# EAGLE board SparkFun_miniUSB_Breakout_Panel_v13b (EAGLE 7.5.0)
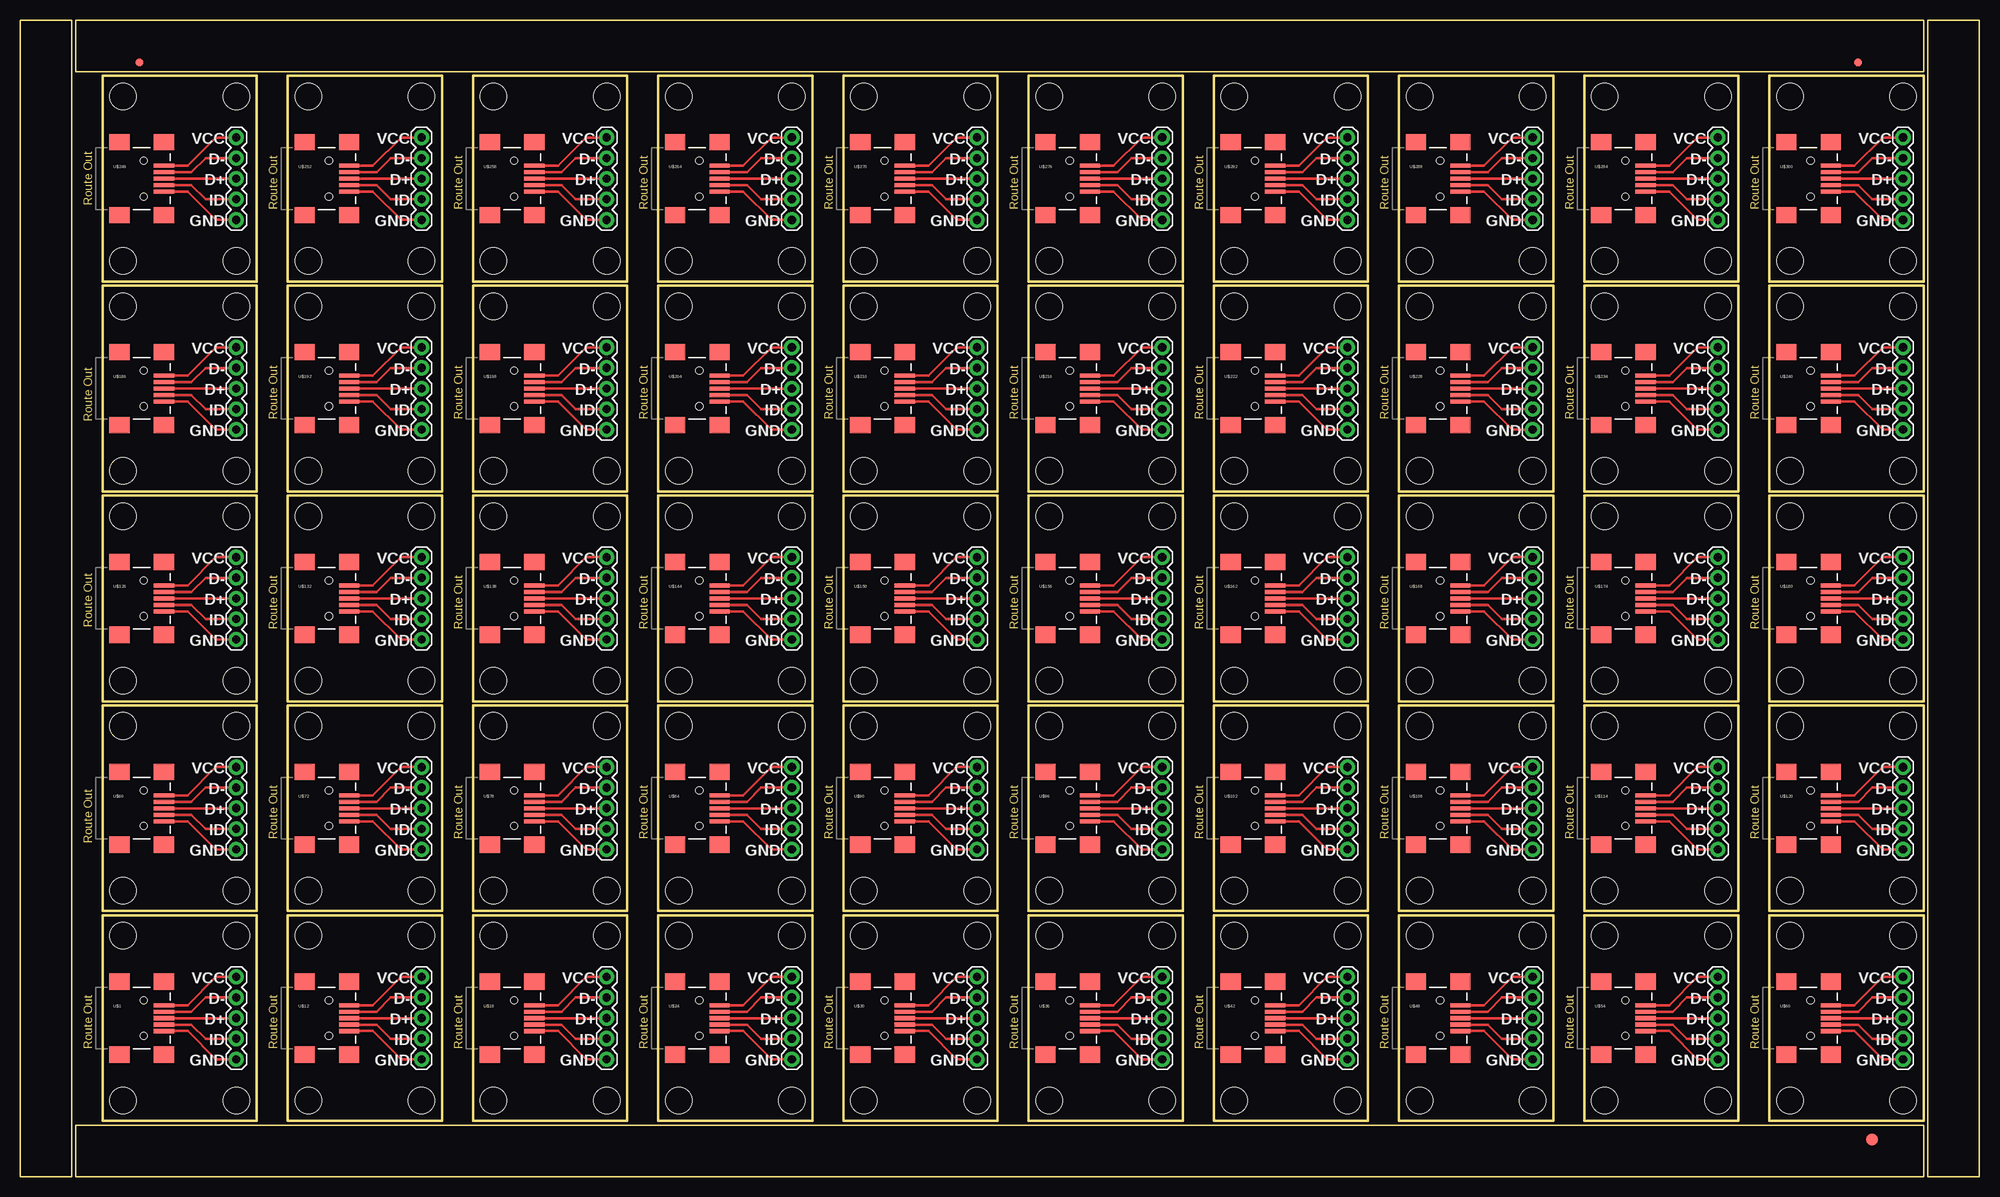
[diagram p0: board, top side]
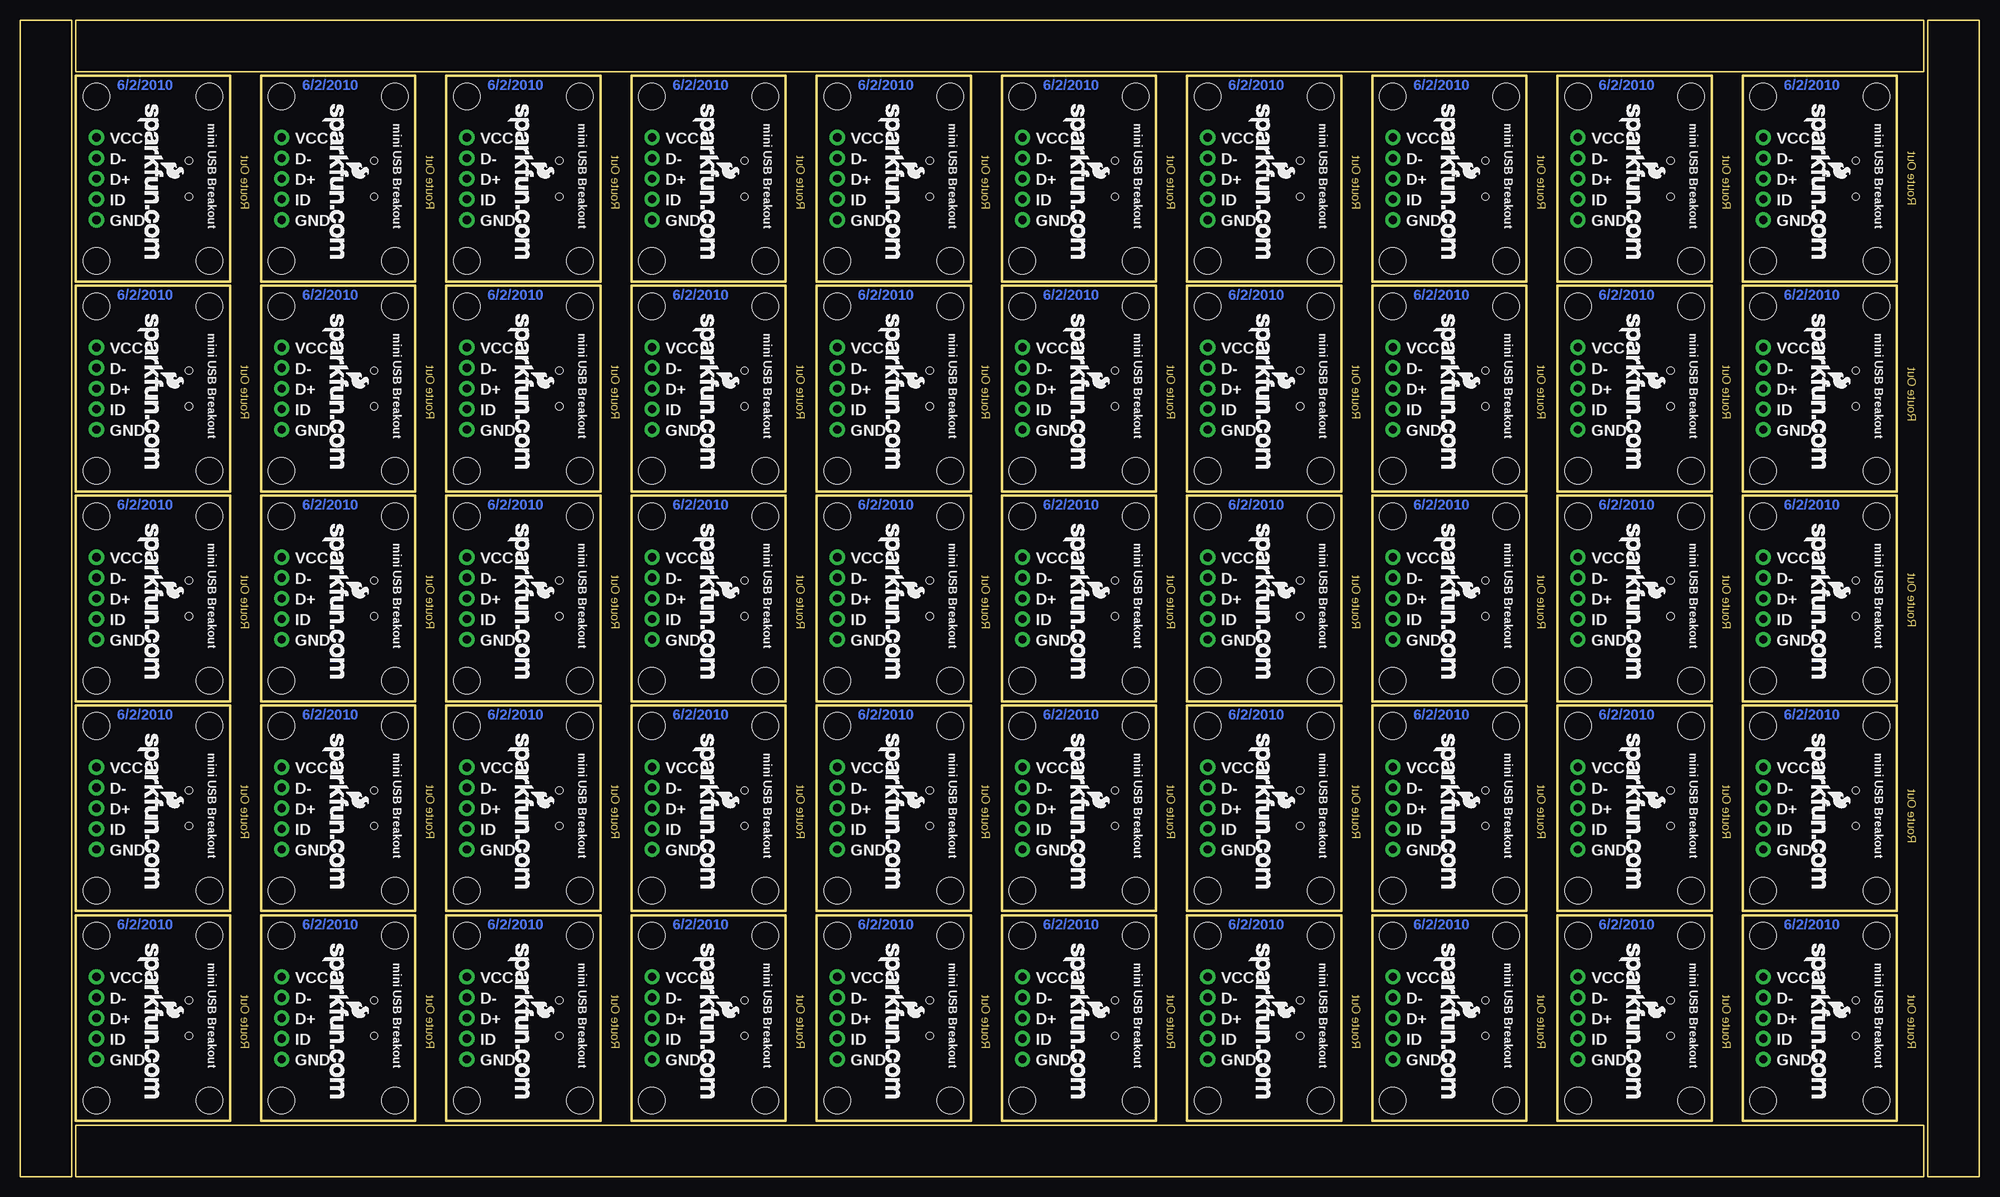
[diagram p1: board, bottom side, seen from below]

Size 241.81 x 142.75 mm. Coordinates in mm from the lower left corner, seen from the top.
Outline: 224 segments
Copper layers (1*16): Top 0.035mm / dielectric 1.5mm / Bottom 0.035mm
Design rules "SparkFun": minimum track width 8mil, minimum drill 20mil, track to track 8mil, track to pad 8mil, pad to pad 8mil, via to via 8mil, smd to smd 8mil, copper to edge 10mil, drill to drill 8mil, minimum pad ring 12mil, minimum via ring 10mil, stop-mask expansion 4mil, vias tented up to drill 20mil, thermal gap 10mil
Net classes: 0 default: width 0.203 mm; 1 power: width 0.305 mm

## Footprints (pad centres in the part's own frame; a part is rotated, then mirrored left to right if it is on the bottom)
FIDUCIAL-1.5X3 = smd 1.5 x 1.5: 1 0,0
FIDUCIAL-1X2 = smd 1 x 1: 1 0,0
1X05 = drill 1.016 pad 1.88: 1 0,0; 2 2.54,0; 3 5.08,0; 4 7.62,0; 5 10.16,0
USB-MINIB = smd 2.5 x 0.5: D+ 2.5,0; D- 2.5,0.8; GND 2.5,-1.6; ID 2.5,-0.8; VBUS 2.5,1.6 | smd 2.5 x 2: MTN1 -3,4.5; MTN2 2.5,4.5; MTN3 -3,-4.5; MTN4 2.5,-4.5 | hole 0.9: 0,2.2; 0,-2.2
STAND-OFF = hole 3.302: 0,0

## Placement (x,y rotation side)
E$1  [FIDUCIAL-1.5X3]  228.6,4.57 0 top
E$7  [FIDUCIAL-1X2]  226.82,137.54 90 top
E$8  [FIDUCIAL-1X2]  14.73,137.54 270 top
JP1  [1X05]  26.67,24.64 270 top
JP2  [1X05]  49.53,24.64 270 top
JP3  [1X05]  72.39,24.64 270 top
JP4  [1X05]  95.25,24.64 270 top
JP5  [1X05]  118.11,24.64 270 top
JP6  [1X05]  140.97,24.64 270 top
JP7  [1X05]  163.83,24.64 270 top
JP8  [1X05]  186.69,24.64 270 top
JP9  [1X05]  209.55,24.64 270 top
JP10  [1X05]  232.41,24.64 270 top
JP11  [1X05]  26.67,50.55 270 top
JP12  [1X05]  49.53,50.55 270 top
JP13  [1X05]  72.39,50.55 270 top
JP14  [1X05]  95.25,50.55 270 top
JP15  [1X05]  118.11,50.55 270 top
JP16  [1X05]  140.97,50.55 270 top
JP17  [1X05]  163.83,50.55 270 top
JP18  [1X05]  186.69,50.55 270 top
JP19  [1X05]  209.55,50.55 270 top
JP20  [1X05]  232.41,50.55 270 top
JP21  [1X05]  26.67,76.45 270 top
JP22  [1X05]  49.53,76.45 270 top
JP23  [1X05]  72.39,76.45 270 top
JP24  [1X05]  95.25,76.45 270 top
JP25  [1X05]  118.11,76.45 270 top
JP26  [1X05]  140.97,76.45 270 top
JP27  [1X05]  163.83,76.45 270 top
JP28  [1X05]  186.69,76.45 270 top
JP29  [1X05]  209.55,76.45 270 top
JP30  [1X05]  232.41,76.45 270 top
JP31  [1X05]  26.67,102.36 270 top
JP32  [1X05]  49.53,102.36 270 top
JP33  [1X05]  72.39,102.36 270 top
JP34  [1X05]  95.25,102.36 270 top
JP35  [1X05]  118.11,102.36 270 top
JP36  [1X05]  140.97,102.36 270 top
JP37  [1X05]  163.83,102.36 270 top
JP38  [1X05]  186.69,102.36 270 top
JP39  [1X05]  209.55,102.36 270 top
JP40  [1X05]  232.41,102.36 270 top
JP41  [1X05]  26.67,128.27 270 top
JP42  [1X05]  49.53,128.27 270 top
JP43  [1X05]  72.39,128.27 270 top
JP44  [1X05]  95.25,128.27 270 top
JP45  [1X05]  118.11,128.27 270 top
JP46  [1X05]  140.97,128.27 270 top
JP47  [1X05]  163.83,128.27 270 top
JP48  [1X05]  186.69,128.27 270 top
JP49  [1X05]  209.55,128.27 270 top
JP50  [1X05]  232.41,128.27 270 top
U$1  USB-MINIB-5PIN  [USB-MINIB]  15.24,19.56 0 top
U$2  STAND-OFF  [STAND-OFF]  26.67,9.4 0 top
U$3  STAND-OFF  [STAND-OFF]  12.7,9.4 0 top
U$4  STAND-OFF  [STAND-OFF]  12.7,29.72 0 top
U$5  STAND-OFF  [STAND-OFF]  26.67,29.72 0 top
U$6  LOGO-SFENEW  [SFE-NEW-WEBLOGO]  21.59,28.7 270 bottom
U$7  STAND-OFF  [STAND-OFF]  49.53,9.4 0 top
U$8  STAND-OFF  [STAND-OFF]  35.56,9.4 0 top
U$9  STAND-OFF  [STAND-OFF]  35.56,29.72 0 top
U$10  STAND-OFF  [STAND-OFF]  49.53,29.72 0 top
U$11  LOGO-SFENEW  [SFE-NEW-WEBLOGO]  44.45,28.7 270 bottom
U$12  USB-MINIB-5PIN  [USB-MINIB]  38.1,19.56 0 top
U$13  STAND-OFF  [STAND-OFF]  72.39,9.4 0 top
U$14  STAND-OFF  [STAND-OFF]  58.42,9.4 0 top
U$15  STAND-OFF  [STAND-OFF]  58.42,29.72 0 top
U$16  STAND-OFF  [STAND-OFF]  72.39,29.72 0 top
U$17  LOGO-SFENEW  [SFE-NEW-WEBLOGO]  67.31,28.7 270 bottom
U$18  USB-MINIB-5PIN  [USB-MINIB]  60.96,19.56 0 top
U$19  STAND-OFF  [STAND-OFF]  95.25,9.4 0 top
U$20  STAND-OFF  [STAND-OFF]  81.28,9.4 0 top
U$21  STAND-OFF  [STAND-OFF]  81.28,29.72 0 top
U$22  STAND-OFF  [STAND-OFF]  95.25,29.72 0 top
U$23  LOGO-SFENEW  [SFE-NEW-WEBLOGO]  90.17,28.7 270 bottom
U$24  USB-MINIB-5PIN  [USB-MINIB]  83.82,19.56 0 top
U$25  STAND-OFF  [STAND-OFF]  118.11,9.4 0 top
U$26  STAND-OFF  [STAND-OFF]  104.14,9.4 0 top
U$27  STAND-OFF  [STAND-OFF]  104.14,29.72 0 top
U$28  STAND-OFF  [STAND-OFF]  118.11,29.72 0 top
U$29  LOGO-SFENEW  [SFE-NEW-WEBLOGO]  113.03,28.7 270 bottom
U$30  USB-MINIB-5PIN  [USB-MINIB]  106.68,19.56 0 top
U$31  STAND-OFF  [STAND-OFF]  140.97,9.4 0 top
U$32  STAND-OFF  [STAND-OFF]  127,9.4 0 top
U$33  STAND-OFF  [STAND-OFF]  127,29.72 0 top
U$34  STAND-OFF  [STAND-OFF]  140.97,29.72 0 top
U$35  LOGO-SFENEW  [SFE-NEW-WEBLOGO]  135.89,28.7 270 bottom
U$36  USB-MINIB-5PIN  [USB-MINIB]  129.54,19.56 0 top
U$37  STAND-OFF  [STAND-OFF]  163.83,9.4 0 top
U$38  STAND-OFF  [STAND-OFF]  149.86,9.4 0 top
U$39  STAND-OFF  [STAND-OFF]  149.86,29.72 0 top
U$40  STAND-OFF  [STAND-OFF]  163.83,29.72 0 top
U$41  LOGO-SFENEW  [SFE-NEW-WEBLOGO]  158.75,28.7 270 bottom
U$42  USB-MINIB-5PIN  [USB-MINIB]  152.4,19.56 0 top
U$43  STAND-OFF  [STAND-OFF]  186.69,9.4 0 top
U$44  STAND-OFF  [STAND-OFF]  172.72,9.4 0 top
U$45  STAND-OFF  [STAND-OFF]  172.72,29.72 0 top
U$46  STAND-OFF  [STAND-OFF]  186.69,29.72 0 top
U$47  LOGO-SFENEW  [SFE-NEW-WEBLOGO]  181.61,28.7 270 bottom
U$48  USB-MINIB-5PIN  [USB-MINIB]  175.26,19.56 0 top
U$49  STAND-OFF  [STAND-OFF]  209.55,9.4 0 top
U$50  STAND-OFF  [STAND-OFF]  195.58,9.4 0 top
U$51  STAND-OFF  [STAND-OFF]  195.58,29.72 0 top
U$52  STAND-OFF  [STAND-OFF]  209.55,29.72 0 top
U$53  LOGO-SFENEW  [SFE-NEW-WEBLOGO]  204.47,28.7 270 bottom
U$54  USB-MINIB-5PIN  [USB-MINIB]  198.12,19.56 0 top
U$55  STAND-OFF  [STAND-OFF]  232.41,9.4 0 top
U$56  STAND-OFF  [STAND-OFF]  218.44,9.4 0 top
U$57  STAND-OFF  [STAND-OFF]  218.44,29.72 0 top
U$58  STAND-OFF  [STAND-OFF]  232.41,29.72 0 top
U$59  LOGO-SFENEW  [SFE-NEW-WEBLOGO]  227.33,28.7 270 bottom
U$60  USB-MINIB-5PIN  [USB-MINIB]  220.98,19.56 0 top
U$61  STAND-OFF  [STAND-OFF]  26.67,35.31 0 top
U$62  STAND-OFF  [STAND-OFF]  12.7,35.31 0 top
U$63  STAND-OFF  [STAND-OFF]  12.7,55.63 0 top
U$64  STAND-OFF  [STAND-OFF]  26.67,55.63 0 top
U$65  LOGO-SFENEW  [SFE-NEW-WEBLOGO]  21.59,54.61 270 bottom
U$66  USB-MINIB-5PIN  [USB-MINIB]  15.24,45.47 0 top
U$67  STAND-OFF  [STAND-OFF]  49.53,35.31 0 top
U$68  STAND-OFF  [STAND-OFF]  35.56,35.31 0 top
U$69  STAND-OFF  [STAND-OFF]  35.56,55.63 0 top
U$70  STAND-OFF  [STAND-OFF]  49.53,55.63 0 top
U$71  LOGO-SFENEW  [SFE-NEW-WEBLOGO]  44.45,54.61 270 bottom
U$72  USB-MINIB-5PIN  [USB-MINIB]  38.1,45.47 0 top
U$73  STAND-OFF  [STAND-OFF]  72.39,35.31 0 top
U$74  STAND-OFF  [STAND-OFF]  58.42,35.31 0 top
U$75  STAND-OFF  [STAND-OFF]  58.42,55.63 0 top
U$76  STAND-OFF  [STAND-OFF]  72.39,55.63 0 top
U$77  LOGO-SFENEW  [SFE-NEW-WEBLOGO]  67.31,54.61 270 bottom
U$78  USB-MINIB-5PIN  [USB-MINIB]  60.96,45.47 0 top
U$79  STAND-OFF  [STAND-OFF]  95.25,35.31 0 top
U$80  STAND-OFF  [STAND-OFF]  81.28,35.31 0 top
U$81  STAND-OFF  [STAND-OFF]  81.28,55.63 0 top
U$82  STAND-OFF  [STAND-OFF]  95.25,55.63 0 top
U$83  LOGO-SFENEW  [SFE-NEW-WEBLOGO]  90.17,54.61 270 bottom
U$84  USB-MINIB-5PIN  [USB-MINIB]  83.82,45.47 0 top
U$85  STAND-OFF  [STAND-OFF]  118.11,35.31 0 top
U$86  STAND-OFF  [STAND-OFF]  104.14,35.31 0 top
U$87  STAND-OFF  [STAND-OFF]  104.14,55.63 0 top
U$88  STAND-OFF  [STAND-OFF]  118.11,55.63 0 top
U$89  LOGO-SFENEW  [SFE-NEW-WEBLOGO]  113.03,54.61 270 bottom
U$90  USB-MINIB-5PIN  [USB-MINIB]  106.68,45.47 0 top
U$91  STAND-OFF  [STAND-OFF]  140.97,35.31 0 top
U$92  STAND-OFF  [STAND-OFF]  127,35.31 0 top
U$93  STAND-OFF  [STAND-OFF]  127,55.63 0 top
U$94  STAND-OFF  [STAND-OFF]  140.97,55.63 0 top
U$95  LOGO-SFENEW  [SFE-NEW-WEBLOGO]  135.89,54.61 270 bottom
U$96  USB-MINIB-5PIN  [USB-MINIB]  129.54,45.47 0 top
U$97  STAND-OFF  [STAND-OFF]  163.83,35.31 0 top
U$98  STAND-OFF  [STAND-OFF]  149.86,35.31 0 top
U$99  STAND-OFF  [STAND-OFF]  149.86,55.63 0 top
U$100  STAND-OFF  [STAND-OFF]  163.83,55.63 0 top
U$101  LOGO-SFENEW  [SFE-NEW-WEBLOGO]  158.75,54.61 270 bottom
U$102  USB-MINIB-5PIN  [USB-MINIB]  152.4,45.47 0 top
U$103  STAND-OFF  [STAND-OFF]  186.69,35.31 0 top
U$104  STAND-OFF  [STAND-OFF]  172.72,35.31 0 top
U$105  STAND-OFF  [STAND-OFF]  172.72,55.63 0 top
U$106  STAND-OFF  [STAND-OFF]  186.69,55.63 0 top
U$107  LOGO-SFENEW  [SFE-NEW-WEBLOGO]  181.61,54.61 270 bottom
U$108  USB-MINIB-5PIN  [USB-MINIB]  175.26,45.47 0 top
U$109  STAND-OFF  [STAND-OFF]  209.55,35.31 0 top
U$110  STAND-OFF  [STAND-OFF]  195.58,35.31 0 top
U$111  STAND-OFF  [STAND-OFF]  195.58,55.63 0 top
U$112  STAND-OFF  [STAND-OFF]  209.55,55.63 0 top
U$113  LOGO-SFENEW  [SFE-NEW-WEBLOGO]  204.47,54.61 270 bottom
U$114  USB-MINIB-5PIN  [USB-MINIB]  198.12,45.47 0 top
U$115  STAND-OFF  [STAND-OFF]  232.41,35.31 0 top
U$116  STAND-OFF  [STAND-OFF]  218.44,35.31 0 top
U$117  STAND-OFF  [STAND-OFF]  218.44,55.63 0 top
U$118  STAND-OFF  [STAND-OFF]  232.41,55.63 0 top
U$119  LOGO-SFENEW  [SFE-NEW-WEBLOGO]  227.33,54.61 270 bottom
U$120  USB-MINIB-5PIN  [USB-MINIB]  220.98,45.47 0 top
U$121  STAND-OFF  [STAND-OFF]  26.67,61.21 0 top
U$122  STAND-OFF  [STAND-OFF]  12.7,61.21 0 top
U$123  STAND-OFF  [STAND-OFF]  12.7,81.53 0 top
U$124  STAND-OFF  [STAND-OFF]  26.67,81.53 0 top
U$125  LOGO-SFENEW  [SFE-NEW-WEBLOGO]  21.59,80.52 270 bottom
U$126  USB-MINIB-5PIN  [USB-MINIB]  15.24,71.37 0 top
U$127  STAND-OFF  [STAND-OFF]  49.53,61.21 0 top
U$128  STAND-OFF  [STAND-OFF]  35.56,61.21 0 top
U$129  STAND-OFF  [STAND-OFF]  35.56,81.53 0 top
U$130  STAND-OFF  [STAND-OFF]  49.53,81.53 0 top
U$131  LOGO-SFENEW  [SFE-NEW-WEBLOGO]  44.45,80.52 270 bottom
U$132  USB-MINIB-5PIN  [USB-MINIB]  38.1,71.37 0 top
U$133  STAND-OFF  [STAND-OFF]  72.39,61.21 0 top
U$134  STAND-OFF  [STAND-OFF]  58.42,61.21 0 top
U$135  STAND-OFF  [STAND-OFF]  58.42,81.53 0 top
U$136  STAND-OFF  [STAND-OFF]  72.39,81.53 0 top
U$137  LOGO-SFENEW  [SFE-NEW-WEBLOGO]  67.31,80.52 270 bottom
U$138  USB-MINIB-5PIN  [USB-MINIB]  60.96,71.37 0 top
U$139  STAND-OFF  [STAND-OFF]  95.25,61.21 0 top
U$140  STAND-OFF  [STAND-OFF]  81.28,61.21 0 top
U$141  STAND-OFF  [STAND-OFF]  81.28,81.53 0 top
U$142  STAND-OFF  [STAND-OFF]  95.25,81.53 0 top
U$143  LOGO-SFENEW  [SFE-NEW-WEBLOGO]  90.17,80.52 270 bottom
U$144  USB-MINIB-5PIN  [USB-MINIB]  83.82,71.37 0 top
U$145  STAND-OFF  [STAND-OFF]  118.11,61.21 0 top
U$146  STAND-OFF  [STAND-OFF]  104.14,61.21 0 top
U$147  STAND-OFF  [STAND-OFF]  104.14,81.53 0 top
U$148  STAND-OFF  [STAND-OFF]  118.11,81.53 0 top
U$149  LOGO-SFENEW  [SFE-NEW-WEBLOGO]  113.03,80.52 270 bottom
U$150  USB-MINIB-5PIN  [USB-MINIB]  106.68,71.37 0 top
U$151  STAND-OFF  [STAND-OFF]  140.97,61.21 0 top
U$152  STAND-OFF  [STAND-OFF]  127,61.21 0 top
U$153  STAND-OFF  [STAND-OFF]  127,81.53 0 top
U$154  STAND-OFF  [STAND-OFF]  140.97,81.53 0 top
U$155  LOGO-SFENEW  [SFE-NEW-WEBLOGO]  135.89,80.52 270 bottom
U$156  USB-MINIB-5PIN  [USB-MINIB]  129.54,71.37 0 top
U$157  STAND-OFF  [STAND-OFF]  163.83,61.21 0 top
U$158  STAND-OFF  [STAND-OFF]  149.86,61.21 0 top
U$159  STAND-OFF  [STAND-OFF]  149.86,81.53 0 top
U$160  STAND-OFF  [STAND-OFF]  163.83,81.53 0 top
U$161  LOGO-SFENEW  [SFE-NEW-WEBLOGO]  158.75,80.52 270 bottom
U$162  USB-MINIB-5PIN  [USB-MINIB]  152.4,71.37 0 top
U$163  STAND-OFF  [STAND-OFF]  186.69,61.21 0 top
U$164  STAND-OFF  [STAND-OFF]  172.72,61.21 0 top
U$165  STAND-OFF  [STAND-OFF]  172.72,81.53 0 top
U$166  STAND-OFF  [STAND-OFF]  186.69,81.53 0 top
U$167  LOGO-SFENEW  [SFE-NEW-WEBLOGO]  181.61,80.52 270 bottom
U$168  USB-MINIB-5PIN  [USB-MINIB]  175.26,71.37 0 top
U$169  STAND-OFF  [STAND-OFF]  209.55,61.21 0 top
U$170  STAND-OFF  [STAND-OFF]  195.58,61.21 0 top
U$171  STAND-OFF  [STAND-OFF]  195.58,81.53 0 top
U$172  STAND-OFF  [STAND-OFF]  209.55,81.53 0 top
U$173  LOGO-SFENEW  [SFE-NEW-WEBLOGO]  204.47,80.52 270 bottom
U$174  USB-MINIB-5PIN  [USB-MINIB]  198.12,71.37 0 top
U$175  STAND-OFF  [STAND-OFF]  232.41,61.21 0 top
U$176  STAND-OFF  [STAND-OFF]  218.44,61.21 0 top
U$177  STAND-OFF  [STAND-OFF]  218.44,81.53 0 top
U$178  STAND-OFF  [STAND-OFF]  232.41,81.53 0 top
U$179  LOGO-SFENEW  [SFE-NEW-WEBLOGO]  227.33,80.52 270 bottom
U$180  USB-MINIB-5PIN  [USB-MINIB]  220.98,71.37 0 top
U$181  STAND-OFF  [STAND-OFF]  26.67,87.12 0 top
U$182  STAND-OFF  [STAND-OFF]  12.7,87.12 0 top
U$183  STAND-OFF  [STAND-OFF]  12.7,107.44 0 top
U$184  STAND-OFF  [STAND-OFF]  26.67,107.44 0 top
U$185  LOGO-SFENEW  [SFE-NEW-WEBLOGO]  21.59,106.43 270 bottom
U$186  USB-MINIB-5PIN  [USB-MINIB]  15.24,97.28 0 top
U$187  STAND-OFF  [STAND-OFF]  49.53,87.12 0 top
U$188  STAND-OFF  [STAND-OFF]  35.56,87.12 0 top
U$189  STAND-OFF  [STAND-OFF]  35.56,107.44 0 top
U$190  STAND-OFF  [STAND-OFF]  49.53,107.44 0 top
U$191  LOGO-SFENEW  [SFE-NEW-WEBLOGO]  44.45,106.43 270 bottom
U$192  USB-MINIB-5PIN  [USB-MINIB]  38.1,97.28 0 top
U$193  STAND-OFF  [STAND-OFF]  72.39,87.12 0 top
U$194  STAND-OFF  [STAND-OFF]  58.42,87.12 0 top
U$195  STAND-OFF  [STAND-OFF]  58.42,107.44 0 top
U$196  STAND-OFF  [STAND-OFF]  72.39,107.44 0 top
U$197  LOGO-SFENEW  [SFE-NEW-WEBLOGO]  67.31,106.43 270 bottom
U$198  USB-MINIB-5PIN  [USB-MINIB]  60.96,97.28 0 top
U$199  STAND-OFF  [STAND-OFF]  95.25,87.12 0 top
U$200  STAND-OFF  [STAND-OFF]  81.28,87.12 0 top
U$201  STAND-OFF  [STAND-OFF]  81.28,107.44 0 top
U$202  STAND-OFF  [STAND-OFF]  95.25,107.44 0 top
U$203  LOGO-SFENEW  [SFE-NEW-WEBLOGO]  90.17,106.43 270 bottom
U$204  USB-MINIB-5PIN  [USB-MINIB]  83.82,97.28 0 top
U$205  STAND-OFF  [STAND-OFF]  118.11,87.12 0 top
U$206  STAND-OFF  [STAND-OFF]  104.14,87.12 0 top
U$207  STAND-OFF  [STAND-OFF]  104.14,107.44 0 top
U$208  STAND-OFF  [STAND-OFF]  118.11,107.44 0 top
U$209  LOGO-SFENEW  [SFE-NEW-WEBLOGO]  113.03,106.43 270 bottom
U$210  USB-MINIB-5PIN  [USB-MINIB]  106.68,97.28 0 top
U$211  STAND-OFF  [STAND-OFF]  140.97,87.12 0 top
U$212  STAND-OFF  [STAND-OFF]  127,87.12 0 top
U$213  STAND-OFF  [STAND-OFF]  127,107.44 0 top
U$214  STAND-OFF  [STAND-OFF]  140.97,107.44 0 top
U$215  LOGO-SFENEW  [SFE-NEW-WEBLOGO]  135.89,106.43 270 bottom
U$216  USB-MINIB-5PIN  [USB-MINIB]  129.54,97.28 0 top
U$217  STAND-OFF  [STAND-OFF]  163.83,87.12 0 top
U$218  STAND-OFF  [STAND-OFF]  149.86,87.12 0 top
U$219  STAND-OFF  [STAND-OFF]  149.86,107.44 0 top
U$220  STAND-OFF  [STAND-OFF]  163.83,107.44 0 top
U$221  LOGO-SFENEW  [SFE-NEW-WEBLOGO]  158.75,106.43 270 bottom
U$222  USB-MINIB-5PIN  [USB-MINIB]  152.4,97.28 0 top
U$223  STAND-OFF  [STAND-OFF]  186.69,87.12 0 top
U$224  STAND-OFF  [STAND-OFF]  172.72,87.12 0 top
U$225  STAND-OFF  [STAND-OFF]  172.72,107.44 0 top
U$226  STAND-OFF  [STAND-OFF]  186.69,107.44 0 top
U$227  LOGO-SFENEW  [SFE-NEW-WEBLOGO]  181.61,106.43 270 bottom
U$228  USB-MINIB-5PIN  [USB-MINIB]  175.26,97.28 0 top
U$229  STAND-OFF  [STAND-OFF]  209.55,87.12 0 top
U$230  STAND-OFF  [STAND-OFF]  195.58,87.12 0 top
U$231  STAND-OFF  [STAND-OFF]  195.58,107.44 0 top
U$232  STAND-OFF  [STAND-OFF]  209.55,107.44 0 top
U$233  LOGO-SFENEW  [SFE-NEW-WEBLOGO]  204.47,106.43 270 bottom
U$234  USB-MINIB-5PIN  [USB-MINIB]  198.12,97.28 0 top
U$235  STAND-OFF  [STAND-OFF]  232.41,87.12 0 top
U$236  STAND-OFF  [STAND-OFF]  218.44,87.12 0 top
U$237  STAND-OFF  [STAND-OFF]  218.44,107.44 0 top
U$238  STAND-OFF  [STAND-OFF]  232.41,107.44 0 top
U$239  LOGO-SFENEW  [SFE-NEW-WEBLOGO]  227.33,106.43 270 bottom
U$240  USB-MINIB-5PIN  [USB-MINIB]  220.98,97.28 0 top
U$241  STAND-OFF  [STAND-OFF]  26.67,113.03 0 top
U$242  STAND-OFF  [STAND-OFF]  12.7,113.03 0 top
U$243  STAND-OFF  [STAND-OFF]  12.7,133.35 0 top
U$244  STAND-OFF  [STAND-OFF]  26.67,133.35 0 top
U$245  LOGO-SFENEW  [SFE-NEW-WEBLOGO]  21.59,132.33 270 bottom
U$246  USB-MINIB-5PIN  [USB-MINIB]  15.24,123.19 0 top
U$247  STAND-OFF  [STAND-OFF]  49.53,113.03 0 top
U$248  STAND-OFF  [STAND-OFF]  35.56,113.03 0 top
U$249  STAND-OFF  [STAND-OFF]  35.56,133.35 0 top
U$250  STAND-OFF  [STAND-OFF]  49.53,133.35 0 top
U$251  LOGO-SFENEW  [SFE-NEW-WEBLOGO]  44.45,132.33 270 bottom
U$252  USB-MINIB-5PIN  [USB-MINIB]  38.1,123.19 0 top
U$253  STAND-OFF  [STAND-OFF]  72.39,113.03 0 top
U$254  STAND-OFF  [STAND-OFF]  58.42,113.03 0 top
U$255  STAND-OFF  [STAND-OFF]  58.42,133.35 0 top
U$256  STAND-OFF  [STAND-OFF]  72.39,133.35 0 top
U$257  LOGO-SFENEW  [SFE-NEW-WEBLOGO]  67.31,132.33 270 bottom
U$258  USB-MINIB-5PIN  [USB-MINIB]  60.96,123.19 0 top
U$259  STAND-OFF  [STAND-OFF]  95.25,113.03 0 top
U$260  STAND-OFF  [STAND-OFF]  81.28,113.03 0 top
U$261  STAND-OFF  [STAND-OFF]  81.28,133.35 0 top
U$262  STAND-OFF  [STAND-OFF]  95.25,133.35 0 top
U$263  LOGO-SFENEW  [SFE-NEW-WEBLOGO]  90.17,132.33 270 bottom
U$264  USB-MINIB-5PIN  [USB-MINIB]  83.82,123.19 0 top
U$265  STAND-OFF  [STAND-OFF]  118.11,113.03 0 top
U$266  STAND-OFF  [STAND-OFF]  104.14,113.03 0 top
U$267  STAND-OFF  [STAND-OFF]  104.14,133.35 0 top
U$268  STAND-OFF  [STAND-OFF]  118.11,133.35 0 top
U$269  LOGO-SFENEW  [SFE-NEW-WEBLOGO]  113.03,132.33 270 bottom
U$270  USB-MINIB-5PIN  [USB-MINIB]  106.68,123.19 0 top
U$271  STAND-OFF  [STAND-OFF]  140.97,113.03 0 top
U$272  STAND-OFF  [STAND-OFF]  127,113.03 0 top
U$273  STAND-OFF  [STAND-OFF]  127,133.35 0 top
U$274  STAND-OFF  [STAND-OFF]  140.97,133.35 0 top
U$275  LOGO-SFENEW  [SFE-NEW-WEBLOGO]  135.89,132.33 270 bottom
U$276  USB-MINIB-5PIN  [USB-MINIB]  129.54,123.19 0 top
U$277  STAND-OFF  [STAND-OFF]  163.83,113.03 0 top
U$278  STAND-OFF  [STAND-OFF]  149.86,113.03 0 top
U$279  STAND-OFF  [STAND-OFF]  149.86,133.35 0 top
U$280  STAND-OFF  [STAND-OFF]  163.83,133.35 0 top
U$281  LOGO-SFENEW  [SFE-NEW-WEBLOGO]  158.75,132.33 270 bottom
U$282  USB-MINIB-5PIN  [USB-MINIB]  152.4,123.19 0 top
U$283  STAND-OFF  [STAND-OFF]  186.69,113.03 0 top
U$284  STAND-OFF  [STAND-OFF]  172.72,113.03 0 top
U$285  STAND-OFF  [STAND-OFF]  172.72,133.35 0 top
U$286  STAND-OFF  [STAND-OFF]  186.69,133.35 0 top
U$287  LOGO-SFENEW  [SFE-NEW-WEBLOGO]  181.61,132.33 270 bottom
U$288  USB-MINIB-5PIN  [USB-MINIB]  175.26,123.19 0 top
U$289  STAND-OFF  [STAND-OFF]  209.55,113.03 0 top
U$290  STAND-OFF  [STAND-OFF]  195.58,113.03 0 top
U$291  STAND-OFF  [STAND-OFF]  195.58,133.35 0 top
U$292  STAND-OFF  [STAND-OFF]  209.55,133.35 0 top
U$293  LOGO-SFENEW  [SFE-NEW-WEBLOGO]  204.47,132.33 270 bottom
U$294  USB-MINIB-5PIN  [USB-MINIB]  198.12,123.19 0 top
U$295  STAND-OFF  [STAND-OFF]  232.41,113.03 0 top
U$296  STAND-OFF  [STAND-OFF]  218.44,113.03 0 top
U$297  STAND-OFF  [STAND-OFF]  218.44,133.35 0 top
U$298  STAND-OFF  [STAND-OFF]  232.41,133.35 0 top
U$299  LOGO-SFENEW  [SFE-NEW-WEBLOGO]  227.33,132.33 270 bottom
U$300  USB-MINIB-5PIN  [USB-MINIB]  220.98,123.19 0 top

## Library data of the parts
E$1 = SparkFun-Retired
E$7 E$8 = SparkFun-Aesthetics
JP1-JP50 U$1-U$300 = SparkFun

## Nets
GND: JP1.5 U$1.GND
GND1: JP2.5 U$12.GND
GND2: JP3.5 U$18.GND
GND3: JP4.5 U$24.GND
GND4: JP5.5 U$30.GND
GND5: JP6.5 U$36.GND
GND6: JP7.5 U$42.GND
GND7: JP8.5 U$48.GND
GND8: JP9.5 U$54.GND
GND9: JP10.5 U$60.GND
GND10: JP11.5 U$66.GND
GND11: JP12.5 U$72.GND
GND12: JP13.5 U$78.GND
GND13: JP14.5 U$84.GND
GND14: JP15.5 U$90.GND
GND15: JP16.5 U$96.GND
GND16: JP17.5 U$102.GND
GND17: JP18.5 U$108.GND
GND18: JP19.5 U$114.GND
GND19: JP20.5 U$120.GND
GND20: JP21.5 U$126.GND
GND21: JP22.5 U$132.GND
GND22: JP23.5 U$138.GND
GND23: JP24.5 U$144.GND
GND24: JP25.5 U$150.GND
GND25: JP26.5 U$156.GND
GND26: JP27.5 U$162.GND
GND27: JP28.5 U$168.GND
GND28: JP29.5 U$174.GND
GND29: JP30.5 U$180.GND
GND30: JP31.5 U$186.GND
GND31: JP32.5 U$192.GND
GND32: JP33.5 U$198.GND
GND33: JP34.5 U$204.GND
GND34: JP35.5 U$210.GND
GND35: JP36.5 U$216.GND
GND36: JP37.5 U$222.GND
GND37: JP38.5 U$228.GND
GND38: JP39.5 U$234.GND
GND39: JP40.5 U$240.GND
GND40: JP41.5 U$246.GND
GND41: JP42.5 U$252.GND
GND42: JP43.5 U$258.GND
GND43: JP44.5 U$264.GND
GND44: JP45.5 U$270.GND
GND45: JP46.5 U$276.GND
GND46: JP47.5 U$282.GND
GND47: JP48.5 U$288.GND
GND48: JP49.5 U$294.GND
GND49: JP50.5 U$300.GND
N$1: JP1.2 U$1.D-
N$2: JP1.1 U$1.VBUS
N$3: JP1.3 U$1.D+
N$4: JP2.2 U$12.D-
N$5: JP1.4 U$1.ID
N$6: JP2.1 U$12.VBUS
N$7: JP2.3 U$12.D+
N$8: JP2.4 U$12.ID
N$9: JP3.2 U$18.D-
N$10: JP3.1 U$18.VBUS
N$11: JP3.3 U$18.D+
N$12: JP3.4 U$18.ID
N$13: JP4.2 U$24.D-
N$14: JP4.1 U$24.VBUS
N$15: JP4.3 U$24.D+
N$16: JP4.4 U$24.ID
N$17: JP5.2 U$30.D-
N$18: JP5.1 U$30.VBUS
N$19: JP5.3 U$30.D+
N$20: JP5.4 U$30.ID
N$21: JP6.2 U$36.D-
N$22: JP6.1 U$36.VBUS
N$23: JP6.3 U$36.D+
N$24: JP6.4 U$36.ID
N$25: JP7.2 U$42.D-
N$26: JP7.1 U$42.VBUS
N$27: JP7.3 U$42.D+
N$28: JP7.4 U$42.ID
N$29: JP8.2 U$48.D-
N$30: JP8.1 U$48.VBUS
N$31: JP8.3 U$48.D+
N$32: JP8.4 U$48.ID
N$33: JP9.2 U$54.D-
N$34: JP9.1 U$54.VBUS
N$35: JP9.3 U$54.D+
N$36: JP9.4 U$54.ID
N$37: JP10.2 U$60.D-
N$38: JP10.1 U$60.VBUS
N$39: JP10.3 U$60.D+
N$40: JP10.4 U$60.ID
N$41: JP11.2 U$66.D-
N$42: JP11.1 U$66.VBUS
N$43: JP11.3 U$66.D+
N$44: JP11.4 U$66.ID
N$45: JP12.2 U$72.D-
N$46: JP12.1 U$72.VBUS
N$47: JP12.3 U$72.D+
N$48: JP12.4 U$72.ID
N$49: JP13.2 U$78.D-
N$50: JP13.1 U$78.VBUS
N$51: JP13.3 U$78.D+
N$52: JP13.4 U$78.ID
N$53: JP14.2 U$84.D-
N$54: JP14.1 U$84.VBUS
N$55: JP14.3 U$84.D+
N$56: JP14.4 U$84.ID
N$57: JP15.2 U$90.D-
N$58: JP15.1 U$90.VBUS
N$59: JP15.3 U$90.D+
N$60: JP15.4 U$90.ID
N$61: JP16.2 U$96.D-
N$62: JP16.1 U$96.VBUS
N$63: JP16.3 U$96.D+
N$64: JP16.4 U$96.ID
N$65: JP17.2 U$102.D-
N$66: JP17.1 U$102.VBUS
N$67: JP17.3 U$102.D+
N$68: JP17.4 U$102.ID
N$69: JP18.2 U$108.D-
N$70: JP18.1 U$108.VBUS
N$71: JP18.3 U$108.D+
N$72: JP18.4 U$108.ID
N$73: JP19.2 U$114.D-
N$74: JP19.1 U$114.VBUS
N$75: JP19.3 U$114.D+
N$76: JP19.4 U$114.ID
N$77: JP20.2 U$120.D-
N$78: JP20.1 U$120.VBUS
N$79: JP20.3 U$120.D+
N$80: JP20.4 U$120.ID
N$81: JP21.2 U$126.D-
N$82: JP21.1 U$126.VBUS
N$83: JP21.3 U$126.D+
N$84: JP21.4 U$126.ID
N$85: JP22.2 U$132.D-
N$86: JP22.1 U$132.VBUS
N$87: JP22.3 U$132.D+
N$88: JP22.4 U$132.ID
N$89: JP23.2 U$138.D-
N$90: JP23.1 U$138.VBUS
N$91: JP23.3 U$138.D+
N$92: JP23.4 U$138.ID
N$93: JP24.2 U$144.D-
N$94: JP24.1 U$144.VBUS
N$95: JP24.3 U$144.D+
N$96: JP24.4 U$144.ID
N$97: JP25.2 U$150.D-
N$98: JP25.1 U$150.VBUS
N$99: JP25.3 U$150.D+
N$100: JP25.4 U$150.ID
N$101: JP26.2 U$156.D-
N$102: JP26.1 U$156.VBUS
N$103: JP26.3 U$156.D+
N$104: JP26.4 U$156.ID
N$105: JP27.2 U$162.D-
N$106: JP27.1 U$162.VBUS
N$107: JP27.3 U$162.D+
N$108: JP27.4 U$162.ID
N$109: JP28.2 U$168.D-
N$110: JP28.1 U$168.VBUS
N$111: JP28.3 U$168.D+
N$112: JP28.4 U$168.ID
N$113: JP29.2 U$174.D-
N$114: JP29.1 U$174.VBUS
N$115: JP29.3 U$174.D+
N$116: JP29.4 U$174.ID
N$117: JP30.2 U$180.D-
N$118: JP30.1 U$180.VBUS
N$119: JP30.3 U$180.D+
N$120: JP30.4 U$180.ID
N$121: JP31.2 U$186.D-
N$122: JP31.1 U$186.VBUS
N$123: JP31.3 U$186.D+
N$124: JP31.4 U$186.ID
N$125: JP32.2 U$192.D-
N$126: JP32.1 U$192.VBUS
N$127: JP32.3 U$192.D+
N$128: JP32.4 U$192.ID
N$129: JP33.2 U$198.D-
N$130: JP33.1 U$198.VBUS
N$131: JP33.3 U$198.D+
N$132: JP33.4 U$198.ID
N$133: JP34.2 U$204.D-
N$134: JP34.1 U$204.VBUS
N$135: JP34.3 U$204.D+
N$136: JP34.4 U$204.ID
N$137: JP35.2 U$210.D-
N$138: JP35.1 U$210.VBUS
N$139: JP35.3 U$210.D+
N$140: JP35.4 U$210.ID
N$141: JP36.2 U$216.D-
N$142: JP36.1 U$216.VBUS
N$143: JP36.3 U$216.D+
N$144: JP36.4 U$216.ID
N$145: JP37.2 U$222.D-
N$146: JP37.1 U$222.VBUS
N$147: JP37.3 U$222.D+
N$148: JP37.4 U$222.ID
N$149: JP38.2 U$228.D-
N$150: JP38.1 U$228.VBUS
N$151: JP38.3 U$228.D+
N$152: JP38.4 U$228.ID
N$153: JP39.2 U$234.D-
N$154: JP39.1 U$234.VBUS
N$155: JP39.3 U$234.D+
N$156: JP39.4 U$234.ID
N$157: JP40.2 U$240.D-
N$158: JP40.1 U$240.VBUS
N$159: JP40.3 U$240.D+
N$160: JP40.4 U$240.ID
N$161: JP41.2 U$246.D-
N$162: JP41.1 U$246.VBUS
N$163: JP41.3 U$246.D+
N$164: JP41.4 U$246.ID
N$165: JP42.2 U$252.D-
N$166: JP42.1 U$252.VBUS
N$167: JP42.3 U$252.D+
N$168: JP42.4 U$252.ID
N$169: JP43.2 U$258.D-
N$170: JP43.1 U$258.VBUS
N$171: JP43.3 U$258.D+
N$172: JP43.4 U$258.ID
N$173: JP44.2 U$264.D-
N$174: JP44.1 U$264.VBUS
N$175: JP44.3 U$264.D+
N$176: JP44.4 U$264.ID
N$177: JP45.2 U$270.D-
N$178: JP45.1 U$270.VBUS
N$179: JP45.3 U$270.D+
N$180: JP45.4 U$270.ID
N$181: JP46.2 U$276.D-
N$182: JP46.1 U$276.VBUS
N$183: JP46.3 U$276.D+
N$184: JP46.4 U$276.ID
N$185: JP47.2 U$282.D-
N$186: JP47.1 U$282.VBUS
N$187: JP47.3 U$282.D+
N$188: JP47.4 U$282.ID
N$189: JP48.2 U$288.D-
N$190: JP48.1 U$288.VBUS
N$191: JP48.3 U$288.D+
N$192: JP48.4 U$288.ID
N$193: JP49.2 U$294.D-
N$194: JP49.1 U$294.VBUS
N$195: JP49.3 U$294.D+
N$196: JP49.4 U$294.ID
N$197: JP50.2 U$300.D-
N$198: JP50.1 U$300.VBUS
N$199: JP50.3 U$300.D+
N$200: JP50.4 U$300.ID

## Tracks (layer width: path | path; a pad name or v marks a point on that pad's centre or on a via)
GND
  Top 0.305: U$1.GND 20.65,17.96 24.13,14.48 JP1.5
GND1
  Top 0.305: U$12.GND 43.51,17.96 46.99,14.48 JP2.5
GND2
  Top 0.305: U$18.GND 66.37,17.96 69.85,14.48 JP3.5
GND3
  Top 0.305: U$24.GND 89.23,17.96 92.71,14.48 JP4.5
GND4
  Top 0.305: U$30.GND 112.09,17.96 115.57,14.48 JP5.5
GND5
  Top 0.305: U$36.GND 134.95,17.96 138.43,14.48 JP6.5
GND6
  Top 0.305: U$42.GND 157.81,17.96 161.29,14.48 JP7.5
GND7
  Top 0.305: U$48.GND 180.67,17.96 184.15,14.48 JP8.5
GND8
  Top 0.305: U$54.GND 203.53,17.96 207.01,14.48 JP9.5
GND9
  Top 0.305: U$60.GND 226.39,17.96 229.87,14.48 JP10.5
GND10
  Top 0.305: U$66.GND 20.65,43.87 24.13,40.39 JP11.5
GND11
  Top 0.305: U$72.GND 43.51,43.87 46.99,40.39 JP12.5
GND12
  Top 0.305: U$78.GND 66.37,43.87 69.85,40.39 JP13.5
GND13
  Top 0.305: U$84.GND 89.23,43.87 92.71,40.39 JP14.5
GND14
  Top 0.305: U$90.GND 112.09,43.87 115.57,40.39 JP15.5
GND15
  Top 0.305: U$96.GND 134.95,43.87 138.43,40.39 JP16.5
GND16
  Top 0.305: U$102.GND 157.81,43.87 161.29,40.39 JP17.5
GND17
  Top 0.305: U$108.GND 180.67,43.87 184.15,40.39 JP18.5
GND18
  Top 0.305: U$114.GND 203.53,43.87 207.01,40.39 JP19.5
GND19
  Top 0.305: U$120.GND 226.39,43.87 229.87,40.39 JP20.5
GND20
  Top 0.305: U$126.GND 20.65,69.77 24.13,66.29 JP21.5
GND21
  Top 0.305: U$132.GND 43.51,69.77 46.99,66.29 JP22.5
GND22
  Top 0.305: U$138.GND 66.37,69.77 69.85,66.29 JP23.5
GND23
  Top 0.305: U$144.GND 89.23,69.77 92.71,66.29 JP24.5
GND24
  Top 0.305: U$150.GND 112.09,69.77 115.57,66.29 JP25.5
GND25
  Top 0.305: U$156.GND 134.95,69.77 138.43,66.29 JP26.5
GND26
  Top 0.305: U$162.GND 157.81,69.77 161.29,66.29 JP27.5
GND27
  Top 0.305: U$168.GND 180.67,69.77 184.15,66.29 JP28.5
GND28
  Top 0.305: U$174.GND 203.53,69.77 207.01,66.29 JP29.5
GND29
  Top 0.305: U$180.GND 226.39,69.77 229.87,66.29 JP30.5
GND30
  Top 0.305: U$186.GND 20.65,95.68 24.13,92.2 JP31.5
GND31
  Top 0.305: U$192.GND 43.51,95.68 46.99,92.2 JP32.5
GND32
  Top 0.305: U$198.GND 66.37,95.68 69.85,92.2 JP33.5
GND33
  Top 0.305: U$204.GND 89.23,95.68 92.71,92.2 JP34.5
GND34
  Top 0.305: U$210.GND 112.09,95.68 115.57,92.2 JP35.5
GND35
  Top 0.305: U$216.GND 134.95,95.68 138.43,92.2 JP36.5
GND36
  Top 0.305: U$222.GND 157.81,95.68 161.29,92.2 JP37.5
GND37
  Top 0.305: U$228.GND 180.67,95.68 184.15,92.2 JP38.5
GND38
  Top 0.305: U$234.GND 203.53,95.68 207.01,92.2 JP39.5
GND39
  Top 0.305: U$240.GND 226.39,95.68 229.87,92.2 JP40.5
GND40
  Top 0.305: U$246.GND 20.65,121.59 24.13,118.11 JP41.5
GND41
  Top 0.305: U$252.GND 43.51,121.59 46.99,118.11 JP42.5
GND42
  Top 0.305: U$258.GND 66.37,121.59 69.85,118.11 JP43.5
GND43
  Top 0.305: U$264.GND 89.23,121.59 92.71,118.11 JP44.5
GND44
  Top 0.305: U$270.GND 112.09,121.59 115.57,118.11 JP45.5
GND45
  Top 0.305: U$276.GND 134.95,121.59 138.43,118.11 JP46.5
GND46
  Top 0.305: U$282.GND 157.81,121.59 161.29,118.11 JP47.5
GND47
  Top 0.305: U$288.GND 180.67,121.59 184.15,118.11 JP48.5
GND48
  Top 0.305: U$294.GND 203.53,121.59 207.01,118.11 JP49.5
GND49
  Top 0.305: U$300.GND 226.39,121.59 229.87,118.11 JP50.5
N$1
  Top 0.305: U$1.D- 21.12,20.36 22.86,22.1 JP1.2
N$2
  Top 0.305: U$1.VBUS 20.65,21.16 24.13,24.64 JP1.1
N$3
  Top 0.305: U$1.D+ JP1.3
N$4
  Top 0.305: U$12.D- 43.98,20.36 45.72,22.1 JP2.2
N$5
  Top 0.305: U$1.ID 21.12,18.76 22.86,17.02 JP1.4
N$6
  Top 0.305: U$12.VBUS 43.51,21.16 46.99,24.64 JP2.1
N$7
  Top 0.305: U$12.D+ JP2.3
N$8
  Top 0.305: U$12.ID 43.98,18.76 45.72,17.02 JP2.4
N$9
  Top 0.305: U$18.D- 66.84,20.36 68.58,22.1 JP3.2
N$10
  Top 0.305: U$18.VBUS 66.37,21.16 69.85,24.64 JP3.1
N$11
  Top 0.305: U$18.D+ JP3.3
N$12
  Top 0.305: U$18.ID 66.84,18.76 68.58,17.02 JP3.4
N$13
  Top 0.305: U$24.D- 89.7,20.36 91.44,22.1 JP4.2
N$14
  Top 0.305: U$24.VBUS 89.23,21.16 92.71,24.64 JP4.1
N$15
  Top 0.305: U$24.D+ JP4.3
N$16
  Top 0.305: U$24.ID 89.7,18.76 91.44,17.02 JP4.4
N$17
  Top 0.305: U$30.D- 112.56,20.36 114.3,22.1 JP5.2
N$18
  Top 0.305: U$30.VBUS 112.09,21.16 115.57,24.64 JP5.1
N$19
  Top 0.305: U$30.D+ JP5.3
N$20
  Top 0.305: U$30.ID 112.56,18.76 114.3,17.02 JP5.4
N$21
  Top 0.305: U$36.D- 135.42,20.36 137.16,22.1 JP6.2
N$22
  Top 0.305: U$36.VBUS 134.95,21.16 138.43,24.64 JP6.1
N$23
  Top 0.305: U$36.D+ JP6.3
N$24
  Top 0.305: U$36.ID 135.42,18.76 137.16,17.02 JP6.4
N$25
  Top 0.305: U$42.D- 158.28,20.36 160.02,22.1 JP7.2
N$26
  Top 0.305: U$42.VBUS 157.81,21.16 161.29,24.64 JP7.1
N$27
  Top 0.305: U$42.D+ JP7.3
N$28
  Top 0.305: U$42.ID 158.28,18.76 160.02,17.02 JP7.4
N$29
  Top 0.305: U$48.D- 181.14,20.36 182.88,22.1 JP8.2
N$30
  Top 0.305: U$48.VBUS 180.67,21.16 184.15,24.64 JP8.1
N$31
  Top 0.305: U$48.D+ JP8.3
N$32
  Top 0.305: U$48.ID 181.14,18.76 182.88,17.02 JP8.4
N$33
  Top 0.305: U$54.D- 204,20.36 205.74,22.1 JP9.2
N$34
  Top 0.305: U$54.VBUS 203.53,21.16 207.01,24.64 JP9.1
N$35
  Top 0.305: U$54.D+ JP9.3
N$36
  Top 0.305: U$54.ID 204,18.76 205.74,17.02 JP9.4
N$37
  Top 0.305: U$60.D- 226.86,20.36 228.6,22.1 JP10.2
N$38
  Top 0.305: U$60.VBUS 226.39,21.16 229.87,24.64 JP10.1
N$39
  Top 0.305: U$60.D+ JP10.3
N$40
  Top 0.305: U$60.ID 226.86,18.76 228.6,17.02 JP10.4
N$41
  Top 0.305: U$66.D- 21.12,46.27 22.86,48.01 JP11.2
N$42
  Top 0.305: U$66.VBUS 20.65,47.07 24.13,50.55 JP11.1
N$43
  Top 0.305: U$66.D+ JP11.3
N$44
  Top 0.305: U$66.ID 21.12,44.67 22.86,42.93 JP11.4
N$45
  Top 0.305: U$72.D- 43.98,46.27 45.72,48.01 JP12.2
N$46
  Top 0.305: U$72.VBUS 43.51,47.07 46.99,50.55 JP12.1
N$47
  Top 0.305: U$72.D+ JP12.3
N$48
  Top 0.305: U$72.ID 43.98,44.67 45.72,42.93 JP12.4
N$49
  Top 0.305: U$78.D- 66.84,46.27 68.58,48.01 JP13.2
N$50
  Top 0.305: U$78.VBUS 66.37,47.07 69.85,50.55 JP13.1
N$51
  Top 0.305: U$78.D+ JP13.3
N$52
  Top 0.305: U$78.ID 66.84,44.67 68.58,42.93 JP13.4
N$53
  Top 0.305: U$84.D- 89.7,46.27 91.44,48.01 JP14.2
N$54
  Top 0.305: U$84.VBUS 89.23,47.07 92.71,50.55 JP14.1
N$55
  Top 0.305: U$84.D+ JP14.3
N$56
  Top 0.305: U$84.ID 89.7,44.67 91.44,42.93 JP14.4
N$57
  Top 0.305: U$90.D- 112.56,46.27 114.3,48.01 JP15.2
N$58
  Top 0.305: U$90.VBUS 112.09,47.07 115.57,50.55 JP15.1
N$59
  Top 0.305: U$90.D+ JP15.3
N$60
  Top 0.305: U$90.ID 112.56,44.67 114.3,42.93 JP15.4
N$61
  Top 0.305: U$96.D- 135.42,46.27 137.16,48.01 JP16.2
N$62
  Top 0.305: U$96.VBUS 134.95,47.07 138.43,50.55 JP16.1
N$63
  Top 0.305: U$96.D+ JP16.3
N$64
  Top 0.305: U$96.ID 135.42,44.67 137.16,42.93 JP16.4
N$65
  Top 0.305: U$102.D- 158.28,46.27 160.02,48.01 JP17.2
N$66
  Top 0.305: U$102.VBUS 157.81,47.07 161.29,50.55 JP17.1
N$67
  Top 0.305: U$102.D+ JP17.3
N$68
  Top 0.305: U$102.ID 158.28,44.67 160.02,42.93 JP17.4
N$69
  Top 0.305: U$108.D- 181.14,46.27 182.88,48.01 JP18.2
N$70
  Top 0.305: U$108.VBUS 180.67,47.07 184.15,50.55 JP18.1
N$71
  Top 0.305: U$108.D+ JP18.3
N$72
  Top 0.305: U$108.ID 181.14,44.67 182.88,42.93 JP18.4
N$73
  Top 0.305: U$114.D- 204,46.27 205.74,48.01 JP19.2
N$74
  Top 0.305: U$114.VBUS 203.53,47.07 207.01,50.55 JP19.1
N$75
  Top 0.305: U$114.D+ JP19.3
N$76
  Top 0.305: U$114.ID 204,44.67 205.74,42.93 JP19.4
N$77
  Top 0.305: U$120.D- 226.86,46.27 228.6,48.01 JP20.2
N$78
  Top 0.305: U$120.VBUS 226.39,47.07 229.87,50.55 JP20.1
N$79
  Top 0.305: U$120.D+ JP20.3
N$80
  Top 0.305: U$120.ID 226.86,44.67 228.6,42.93 JP20.4
N$81
  Top 0.305: U$126.D- 21.12,72.17 22.86,73.91 JP21.2
N$82
  Top 0.305: U$126.VBUS 20.65,72.97 24.13,76.45 JP21.1
N$83
  Top 0.305: U$126.D+ JP21.3
N$84
  Top 0.305: U$126.ID 21.12,70.57 22.86,68.83 JP21.4
N$85
  Top 0.305: U$132.D- 43.98,72.17 45.72,73.91 JP22.2
N$86
  Top 0.305: U$132.VBUS 43.51,72.97 46.99,76.45 JP22.1
N$87
  Top 0.305: U$132.D+ JP22.3
N$88
  Top 0.305: U$132.ID 43.98,70.57 45.72,68.83 JP22.4
N$89
  Top 0.305: U$138.D- 66.84,72.17 68.58,73.91 JP23.2
N$90
  Top 0.305: U$138.VBUS 66.37,72.97 69.85,76.45 JP23.1
N$91
  Top 0.305: U$138.D+ JP23.3
N$92
  Top 0.305: U$138.ID 66.84,70.57 68.58,68.83 JP23.4
N$93
  Top 0.305: U$144.D- 89.7,72.17 91.44,73.91 JP24.2
N$94
  Top 0.305: U$144.VBUS 89.23,72.97 92.71,76.45 JP24.1
N$95
  Top 0.305: U$144.D+ JP24.3
N$96
  Top 0.305: U$144.ID 89.7,70.57 91.44,68.83 JP24.4
N$97
  Top 0.305: U$150.D- 112.56,72.17 114.3,73.91 JP25.2
N$98
  Top 0.305: U$150.VBUS 112.09,72.97 115.57,76.45 JP25.1
N$99
  Top 0.305: U$150.D+ JP25.3
N$100
  Top 0.305: U$150.ID 112.56,70.57 114.3,68.83 JP25.4
N$101
  Top 0.305: U$156.D- 135.42,72.17 137.16,73.91 JP26.2
N$102
  Top 0.305: U$156.VBUS 134.95,72.97 138.43,76.45 JP26.1
N$103
  Top 0.305: U$156.D+ JP26.3
N$104
  Top 0.305: U$156.ID 135.42,70.57 137.16,68.83 JP26.4
N$105
  Top 0.305: U$162.D- 158.28,72.17 160.02,73.91 JP27.2
N$106
  Top 0.305: U$162.VBUS 157.81,72.97 161.29,76.45 JP27.1
N$107
  Top 0.305: U$162.D+ JP27.3
N$108
  Top 0.305: U$162.ID 158.28,70.57 160.02,68.83 JP27.4
N$109
  Top 0.305: U$168.D- 181.14,72.17 182.88,73.91 JP28.2
N$110
  Top 0.305: U$168.VBUS 180.67,72.97 184.15,76.45 JP28.1
N$111
  Top 0.305: U$168.D+ JP28.3
N$112
  Top 0.305: U$168.ID 181.14,70.57 182.88,68.83 JP28.4
N$113
  Top 0.305: U$174.D- 204,72.17 205.74,73.91 JP29.2
N$114
  Top 0.305: U$174.VBUS 203.53,72.97 207.01,76.45 JP29.1
N$115
  Top 0.305: U$174.D+ JP29.3
N$116
  Top 0.305: U$174.ID 204,70.57 205.74,68.83 JP29.4
N$117
  Top 0.305: U$180.D- 226.86,72.17 228.6,73.91 JP30.2
N$118
  Top 0.305: U$180.VBUS 226.39,72.97 229.87,76.45 JP30.1
N$119
  Top 0.305: U$180.D+ JP30.3
N$120
  Top 0.305: U$180.ID 226.86,70.57 228.6,68.83 JP30.4
N$121
  Top 0.305: U$186.D- 21.12,98.08 22.86,99.82 JP31.2
N$122
  Top 0.305: U$186.VBUS 20.65,98.88 24.13,102.36 JP31.1
N$123
  Top 0.305: U$186.D+ JP31.3
N$124
  Top 0.305: U$186.ID 21.12,96.48 22.86,94.74 JP31.4
N$125
  Top 0.305: U$192.D- 43.98,98.08 45.72,99.82 JP32.2
N$126
  Top 0.305: U$192.VBUS 43.51,98.88 46.99,102.36 JP32.1
N$127
  Top 0.305: U$192.D+ JP32.3
N$128
  Top 0.305: U$192.ID 43.98,96.48 45.72,94.74 JP32.4
N$129
  Top 0.305: U$198.D- 66.84,98.08 68.58,99.82 JP33.2
N$130
  Top 0.305: U$198.VBUS 66.37,98.88 69.85,102.36 JP33.1
N$131
  Top 0.305: U$198.D+ JP33.3
N$132
  Top 0.305: U$198.ID 66.84,96.48 68.58,94.74 JP33.4
N$133
  Top 0.305: U$204.D- 89.7,98.08 91.44,99.82 JP34.2
N$134
  Top 0.305: U$204.VBUS 89.23,98.88 92.71,102.36 JP34.1
N$135
  Top 0.305: U$204.D+ JP34.3
N$136
  Top 0.305: U$204.ID 89.7,96.48 91.44,94.74 JP34.4
N$137
  Top 0.305: U$210.D- 112.56,98.08 114.3,99.82 JP35.2
N$138
  Top 0.305: U$210.VBUS 112.09,98.88 115.57,102.36 JP35.1
N$139
  Top 0.305: U$210.D+ JP35.3
N$140
  Top 0.305: U$210.ID 112.56,96.48 114.3,94.74 JP35.4
N$141
  Top 0.305: U$216.D- 135.42,98.08 137.16,99.82 JP36.2
N$142
  Top 0.305: U$216.VBUS 134.95,98.88 138.43,102.36 JP36.1
N$143
  Top 0.305: U$216.D+ JP36.3
N$144
  Top 0.305: U$216.ID 135.42,96.48 137.16,94.74 JP36.4
N$145
  Top 0.305: U$222.D- 158.28,98.08 160.02,99.82 JP37.2
N$146
  Top 0.305: U$222.VBUS 157.81,98.88 161.29,102.36 JP37.1
N$147
  Top 0.305: U$222.D+ JP37.3
N$148
  Top 0.305: U$222.ID 158.28,96.48 160.02,94.74 JP37.4
N$149
  Top 0.305: U$228.D- 181.14,98.08 182.88,99.82 JP38.2
N$150
  Top 0.305: U$228.VBUS 180.67,98.88 184.15,102.36 JP38.1
N$151
  Top 0.305: U$228.D+ JP38.3
N$152
  Top 0.305: U$228.ID 181.14,96.48 182.88,94.74 JP38.4
N$153
  Top 0.305: U$234.D- 204,98.08 205.74,99.82 JP39.2
N$154
  Top 0.305: U$234.VBUS 203.53,98.88 207.01,102.36 JP39.1
N$155
  Top 0.305: U$234.D+ JP39.3
N$156
  Top 0.305: U$234.ID 204,96.48 205.74,94.74 JP39.4
N$157
  Top 0.305: U$240.D- 226.86,98.08 228.6,99.82 JP40.2
N$158
  Top 0.305: U$240.VBUS 226.39,98.88 229.87,102.36 JP40.1
N$159
  Top 0.305: U$240.D+ JP40.3
N$160
  Top 0.305: U$240.ID 226.86,96.48 228.6,94.74 JP40.4
N$161
  Top 0.305: U$246.D- 21.12,123.99 22.86,125.73 JP41.2
N$162
  Top 0.305: U$246.VBUS 20.65,124.79 24.13,128.27 JP41.1
N$163
  Top 0.305: U$246.D+ JP41.3
N$164
  Top 0.305: U$246.ID 21.12,122.39 22.86,120.65 JP41.4
N$165
  Top 0.305: U$252.D- 43.98,123.99 45.72,125.73 JP42.2
N$166
  Top 0.305: U$252.VBUS 43.51,124.79 46.99,128.27 JP42.1
N$167
  Top 0.305: U$252.D+ JP42.3
N$168
  Top 0.305: U$252.ID 43.98,122.39 45.72,120.65 JP42.4
N$169
  Top 0.305: U$258.D- 66.84,123.99 68.58,125.73 JP43.2
N$170
  Top 0.305: U$258.VBUS 66.37,124.79 69.85,128.27 JP43.1
N$171
  Top 0.305: U$258.D+ JP43.3
N$172
  Top 0.305: U$258.ID 66.84,122.39 68.58,120.65 JP43.4
N$173
  Top 0.305: U$264.D- 89.7,123.99 91.44,125.73 JP44.2
N$174
  Top 0.305: U$264.VBUS 89.23,124.79 92.71,128.27 JP44.1
N$175
  Top 0.305: U$264.D+ JP44.3
N$176
  Top 0.305: U$264.ID 89.7,122.39 91.44,120.65 JP44.4
N$177
  Top 0.305: U$270.D- 112.56,123.99 114.3,125.73 JP45.2
N$178
  Top 0.305: U$270.VBUS 112.09,124.79 115.57,128.27 JP45.1
N$179
  Top 0.305: U$270.D+ JP45.3
N$180
  Top 0.305: U$270.ID 112.56,122.39 114.3,120.65 JP45.4
N$181
  Top 0.305: U$276.D- 135.42,123.99 137.16,125.73 JP46.2
N$182
  Top 0.305: U$276.VBUS 134.95,124.79 138.43,128.27 JP46.1
N$183
  Top 0.305: U$276.D+ JP46.3
N$184
  Top 0.305: U$276.ID 135.42,122.39 137.16,120.65 JP46.4
N$185
  Top 0.305: U$282.D- 158.28,123.99 160.02,125.73 JP47.2
N$186
  Top 0.305: U$282.VBUS 157.81,124.79 161.29,128.27 JP47.1
N$187
  Top 0.305: U$282.D+ JP47.3
N$188
  Top 0.305: U$282.ID 158.28,122.39 160.02,120.65 JP47.4
N$189
  Top 0.305: U$288.D- 181.14,123.99 182.88,125.73 JP48.2
N$190
  Top 0.305: U$288.VBUS 180.67,124.79 184.15,128.27 JP48.1
N$191
  Top 0.305: U$288.D+ JP48.3
N$192
  Top 0.305: U$288.ID 181.14,122.39 182.88,120.65 JP48.4
N$193
  Top 0.305: U$294.D- 204,123.99 205.74,125.73 JP49.2
N$194
  Top 0.305: U$294.VBUS 203.53,124.79 207.01,128.27 JP49.1
N$195
  Top 0.305: U$294.D+ JP49.3
N$196
  Top 0.305: U$294.ID 204,122.39 205.74,120.65 JP49.4
N$197
  Top 0.305: U$300.D- 226.86,123.99 228.6,125.73 JP50.2
N$198
  Top 0.305: U$300.VBUS 226.39,124.79 229.87,128.27 JP50.1
N$199
  Top 0.305: U$300.D+ JP50.3
N$200
  Top 0.305: U$300.ID 226.86,122.39 228.6,120.65 JP50.4

## Text on the board
Bottom: 6/2/2010 | 6/2/2010 | 6/2/2010 | 6/2/2010 | 6/2/2010 | 6/2/2010 | 6/2/2010 | 6/2/2010 | 6/2/2010 | 6/2/2010 | 6/2/2010 | 6/2/2010 | 6/2/2010 | 6/2/2010 | 6/2/2010 | 6/2/2010 | 6/2/2010 | 6/2/2010 | 6/2/2010 | 6/2/2010 | 6/2/2010 | 6/2/2010 | 6/2/2010 | 6/2/2010 | 6/2/2010 | 6/2/2010 | 6/2/2010 | 6/2/2010 | 6/2/2010 | 6/2/2010 | 6/2/2010 | 6/2/2010 | 6/2/2010 | 6/2/2010 | 6/2/2010 | 6/2/2010 | 6/2/2010 | 6/2/2010 | 6/2/2010 | 6/2/2010 | 6/2/2010 | 6/2/2010 | 6/2/2010 | 6/2/2010 | 6/2/2010 | 6/2/2010 | 6/2/2010 | 6/2/2010 | 6/2/2010 | 6/2/2010
Dimension: Route Out | Route Out | Route Out | Route Out | Route Out | Route Out | Route Out | Route Out | Route Out | Route Out | Route Out | Route Out | Route Out | Route Out | Route Out | Route Out | Route Out | Route Out | Route Out | Route Out | Route Out | Route Out | Route Out | Route Out | Route Out | Route Out | Route Out | Route Out | Route Out | Route Out | Route Out | Route Out | Route Out | Route Out | Route Out | Route Out | Route Out | Route Out | Route Out | Route Out | Route Out | Route Out | Route Out | Route Out | Route Out | Route Out | Route Out | Route Out | Route Out | Route Out
tPlace: VCC | VCC | VCC | VCC | VCC | VCC | VCC | VCC | VCC | VCC | D- | D- | D- | D- | D- | D- | D- | D- | D- | D- | D+ | D+ | D+ | D+ | D+ | D+ | D+ | D+ | D+ | D+ | ID | ID | ID | ID | ID | ID | ID | ID | ID | ID | GND | GND | GND | GND | GND | GND | GND | GND | GND | GND | VCC | VCC | VCC | VCC | VCC | VCC | VCC | VCC | VCC | VCC | D- | D- | D- | D- | D- | D- | D- | D- | D- | D- | D+ | D+ | D+ | D+ | D+ | D+ | D+ | D+ | D+ | D+ | ID | ID | ID | ID | ID | ID | ID | ID | ID | ID | GND | GND | GND | GND | GND | GND | GND | GND | GND | GND | VCC | VCC | VCC | VCC | VCC | VCC | VCC | VCC | VCC | VCC | D- | D- | D- | D- | D- | D- | D- | D- | D- | D- | D+ | D+ | D+ | D+ | D+ | D+ | D+ | D+ | D+ | D+ | ID | ID | ID | ID | ID | ID | ID | ID | ID | ID | GND | GND | GND | GND | GND | GND | GND | GND | GND | GND | VCC | VCC | VCC | VCC | VCC | VCC | VCC | VCC | VCC | VCC | D- | D- | D- | D- | D- | D- | D- | D- | D- | D- | D+ | D+ | D+ | D+ | D+ | D+ | D+ | D+ | D+ | D+ | ID | ID | ID | ID | ID | ID | ID | ID | ID | ID | GND | GND | GND | GND | GND | GND | GND | GND | GND | GND | VCC | VCC | VCC | VCC | VCC | VCC | VCC | VCC | VCC | VCC | D- | D- | D- | D- | D- | D- | D- | D- | D- | D- | D+ | D+ | D+ | D+ | D+ | D+ | D+ | D+ | D+ | D+ | ID | ID | ID | ID | ID | ID | ID | ID | ID | ID | GND | GND | GND | GND | GND | GND | GND | GND | GND | GND
bPlace: mini USB Breakout | mini USB Breakout | mini USB Breakout | mini USB Breakout | mini USB Breakout | mini USB Breakout | mini USB Breakout | mini USB Breakout | mini USB Breakout | mini USB Breakout | VCC | VCC | VCC | VCC | VCC | VCC | VCC | VCC | VCC | VCC | D- | D- | D- | D- | D- | D- | D- | D- | D- | D- | D+ | D+ | D+ | D+ | D+ | D+ | D+ | D+ | D+ | D+ | ID | ID | ID | ID | ID | ID | ID | ID | ID | ID | GND | GND | GND | GND | GND | GND | GND | GND | GND | GND | mini USB Breakout | mini USB Breakout | mini USB Breakout | mini USB Breakout | mini USB Breakout | mini USB Breakout | mini USB Breakout | mini USB Breakout | mini USB Breakout | mini USB Breakout | VCC | VCC | VCC | VCC | VCC | VCC | VCC | VCC | VCC | VCC | D- | D- | D- | D- | D- | D- | D- | D- | D- | D- | D+ | D+ | D+ | D+ | D+ | D+ | D+ | D+ | D+ | D+ | ID | ID | ID | ID | ID | ID | ID | ID | ID | ID | GND | GND | GND | GND | GND | GND | GND | GND | GND | GND | mini USB Breakout | mini USB Breakout | mini USB Breakout | mini USB Breakout | mini USB Breakout | mini USB Breakout | mini USB Breakout | mini USB Breakout | mini USB Breakout | mini USB Breakout | VCC | VCC | VCC | VCC | VCC | VCC | VCC | VCC | VCC | VCC | D- | D- | D- | D- | D- | D- | D- | D- | D- | D- | D+ | D+ | D+ | D+ | D+ | D+ | D+ | D+ | D+ | D+ | ID | ID | ID | ID | ID | ID | ID | ID | ID | ID | GND | GND | GND | GND | GND | GND | GND | GND | GND | GND | mini USB Breakout | mini USB Breakout | mini USB Breakout | mini USB Breakout | mini USB Breakout | mini USB Breakout | mini USB Breakout | mini USB Breakout | mini USB Breakout | mini USB Breakout | VCC | VCC | VCC | VCC | VCC | VCC | VCC | VCC | VCC | VCC | D- | D- | D- | D- | D- | D- | D- | D- | D- | D- | D+ | D+ | D+ | D+ | D+ | D+ | D+ | D+ | D+ | D+ | ID | ID | ID | ID | ID | ID | ID | ID | ID | ID | GND | GND | GND | GND | GND | GND | GND | GND | GND | GND | mini USB Breakout | mini USB Breakout | mini USB Breakout | mini USB Breakout | mini USB Breakout | mini USB Breakout | mini USB Breakout | mini USB Breakout | mini USB Breakout | mini USB Breakout | VCC | VCC | VCC | VCC | VCC | VCC | VCC | VCC | VCC | VCC | D- | D- | D- | D- | D- | D- | D- | D- | D- | D- | D+ | D+ | D+ | D+ | D+ | D+ | D+ | D+ | D+ | D+ | ID | ID | ID | ID | ID | ID | ID | ID | ID | ID | GND | GND | GND | GND | GND | GND | GND | GND | GND | GND